# Altium PCB acqboard.PcbDoc (part 2 of 5)
Units mil, origin at the board's own origin, x right, y up, seen from the top; angles counter-clockwise.
Board outline 7000 x 5250 mil, 4 copper layers (Top Layer, Internal Plane 1, Internal Plane 2, Bottom Layer); 570 components, 356 nets, 1973 pads, 766 vias.
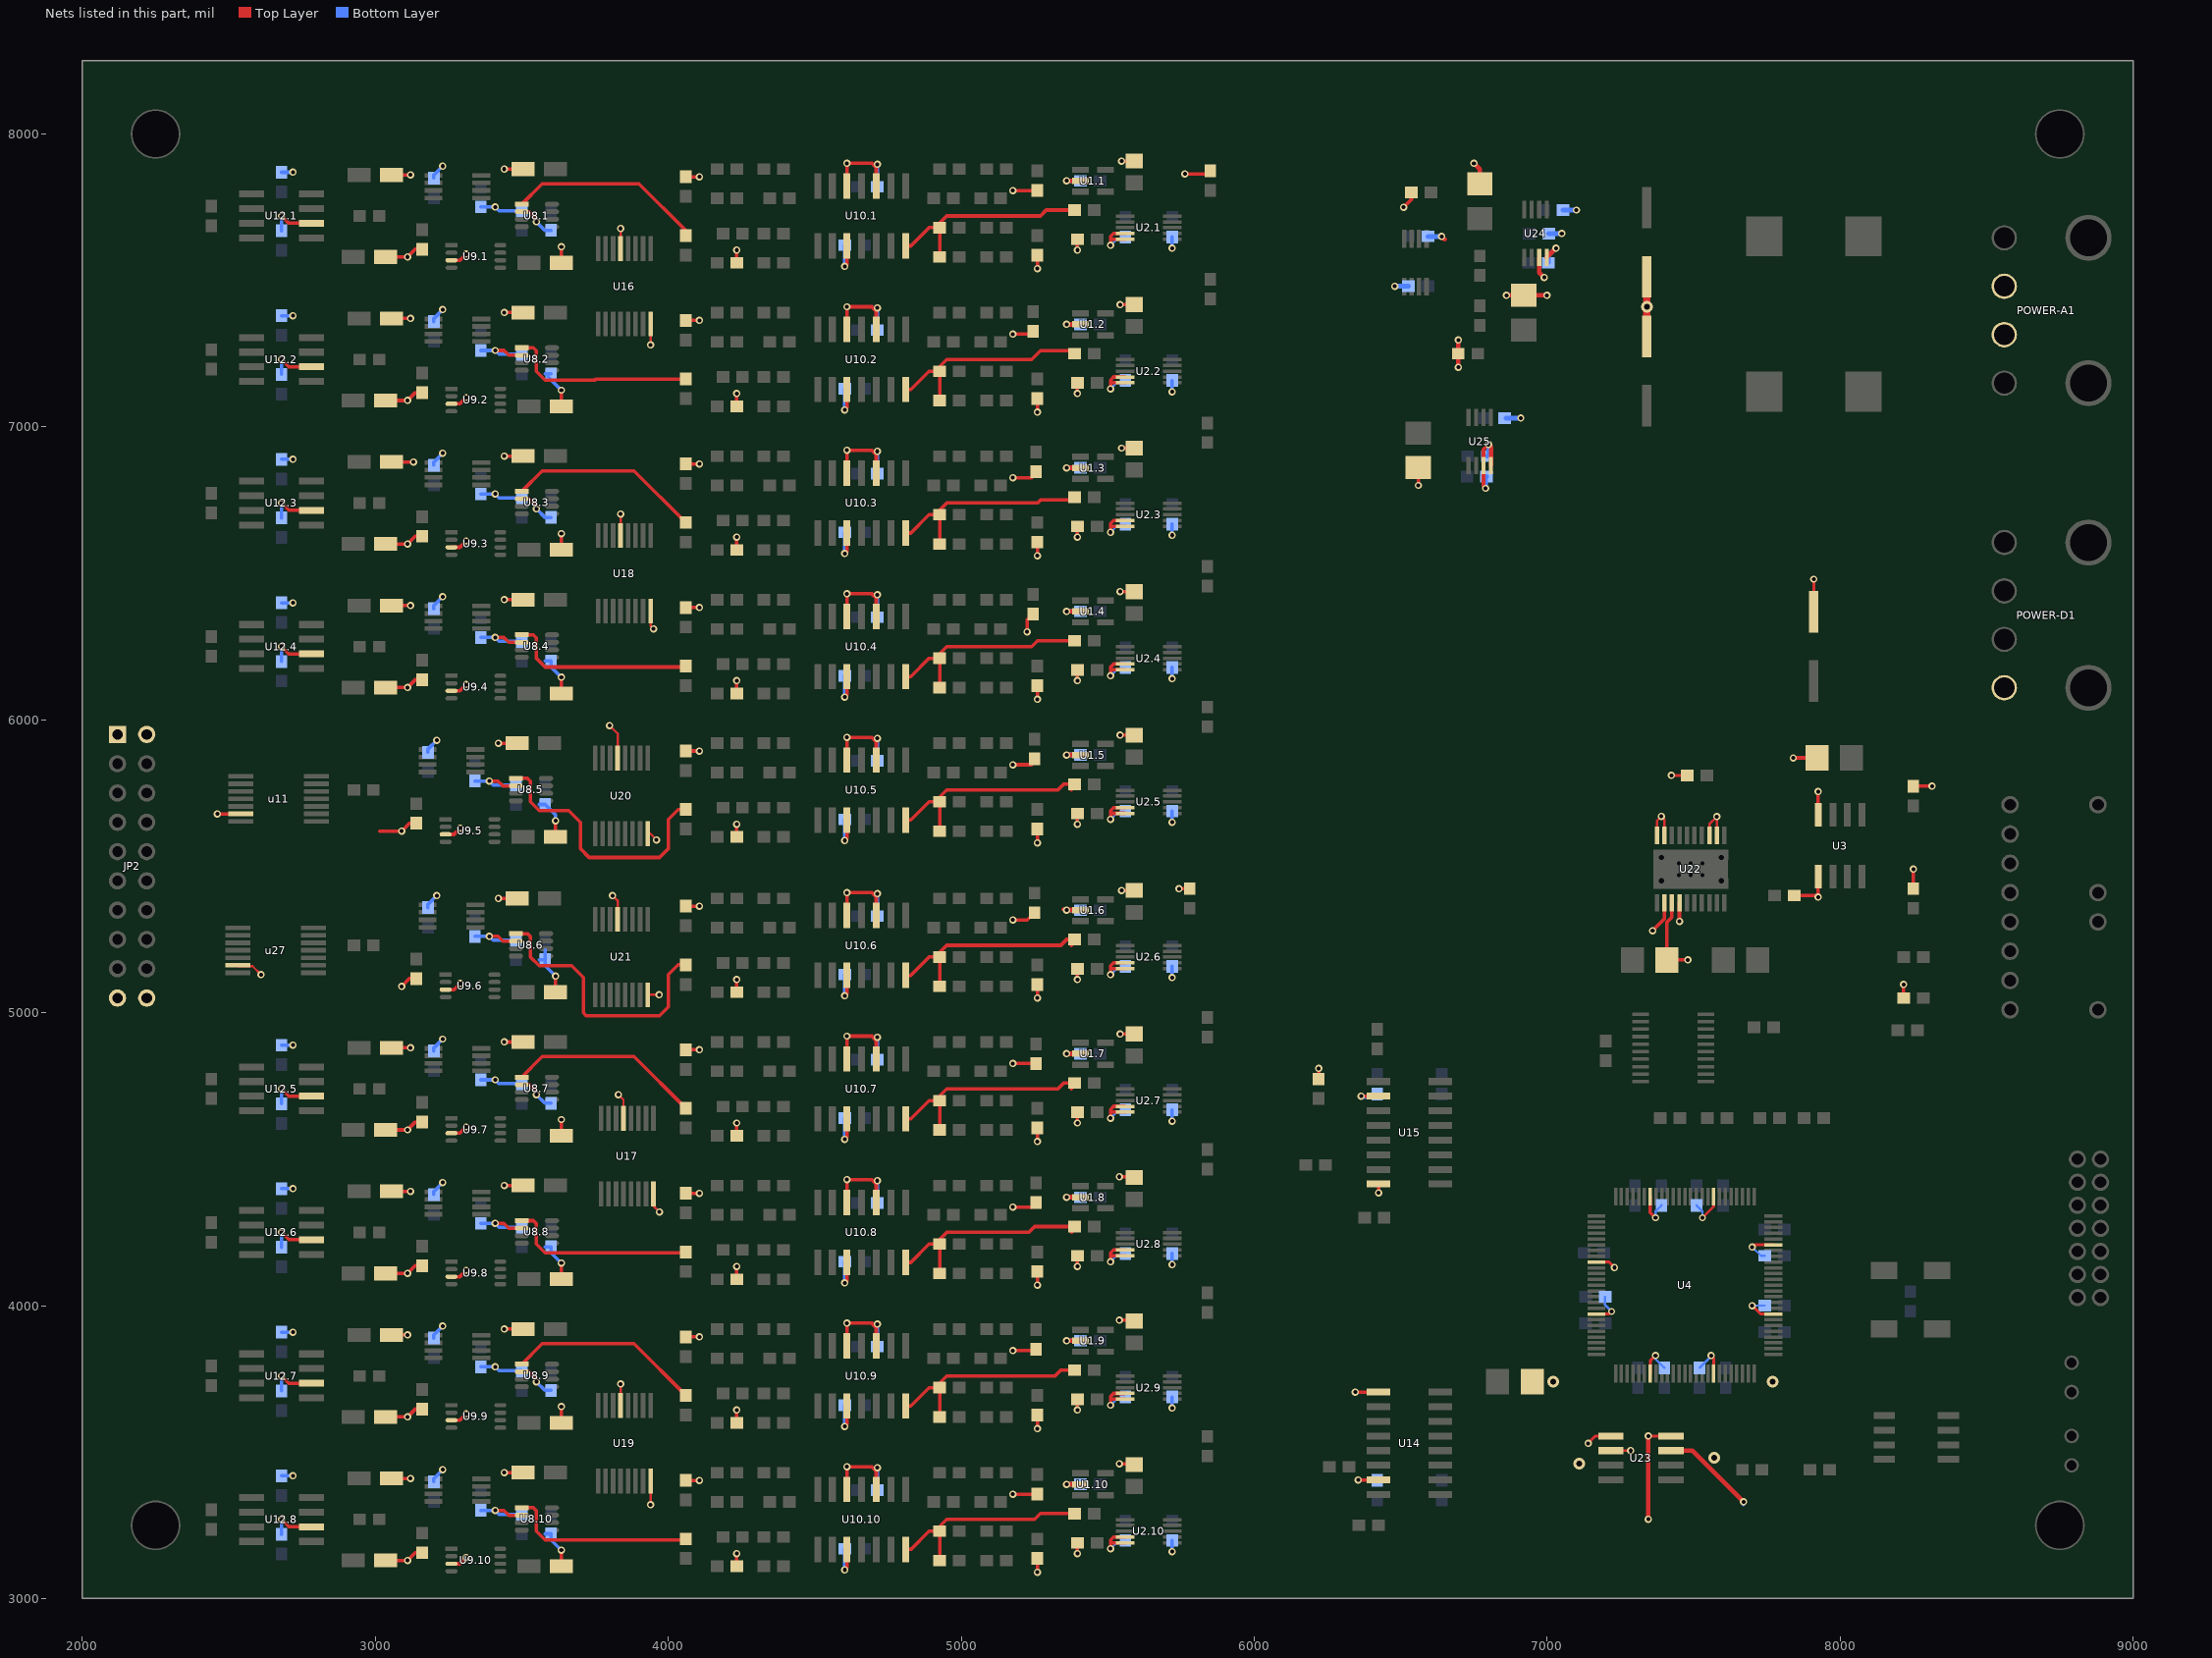
[diagram p4: the nets of this part, all layers, seen from the top]

## Components (designator, comment, footprint, x,y, rotation, side; value= is the part's Value field where it differs from the comment) (continued)
U8.2 "LTC6910-1" TSOT-23-8 3500,7270 r0 top (schematic designator U8)
U8.3 "LTC6910-1" TSOT-23-8 3500,6780 r0 top (schematic designator U8)
U8.4 "LTC6910-1" TSOT-23-8 3500,6290 r0 top (schematic designator U8)
U8.5 "LTC6910-1" TSOT-23-8 3480,5800 r0 top (schematic designator U8)
U8.6 "LTC6910-1" TSOT-23-8 3480,5270 r0 top (schematic designator U8)
U8.7 "LTC6910-1" TSOT-23-8 3500,4780 r0 top (schematic designator U8)
U8.8 "LTC6910-1" TSOT-23-8 3500,4290 r0 top (schematic designator U8)
U8.9 "LTC6910-1" TSOT-23-8 3500,3800 r0 top (schematic designator U8)
U8.10 "LTC6910-1" TSOT-23-8 3500,3310 r0 top (schematic designator U8)
U9.1 "ADG619BRM" MSOP8 3260,7620 r0 top (schematic designator U9)
U9.2 "ADG619BRM" MSOP8 3260,7130 r0 top (schematic designator U9)
U9.3 "ADG619BRM" MSOP8 3260,6640 r0 top (schematic designator U9)
U9.4 "ADG619BRM" MSOP8 3260,6150 r0 top (schematic designator U9)
U9.5 "ADG619BRM" MSOP8 3240,5660 r0 top (schematic designator U9)
U9.6 "ADG619BRM" MSOP8 3240,5130 r0 top (schematic designator U9)
U9.7 "ADG619BRM" MSOP8 3260,4640 r0 top (schematic designator U9)
U9.8 "ADG619BRM" MSOP8 3260,4150 r0 top (schematic designator U9)
U9.9 "ADG619BRM" MSOP8 3260,3660 r0 top (schematic designator U9)
U9.10 "ADG619BRM" MSOP8 3260,3170 r0 top (schematic designator U9)
U10.1 "AD8513 ARU" SO-G14 4660,7720 r0 top (schematic designator U10)
U10.2 "AD8513 ARU" SO-G14 4660,7230 r0 top (schematic designator U10)
U10.3 "AD8513 ARU" SO-G14 4660,6740 r0 top (schematic designator U10)
U10.4 "AD8513 ARU" SO-G14 4660,6250 r0 top (schematic designator U10)
U10.5 "AD8513 ARU" SO-G14 4660,5760 r0 top (schematic designator U10)
U10.6 "AD8513 ARU" SO-G14 4660,5230 r0 top (schematic designator U10)
U10.7 "AD8513 ARU" SO-G14 4660,4740 r0 top (schematic designator U10)
U10.8 "AD8513 ARU" SO-G14 4660,4250 r0 top (schematic designator U10)
U10.9 "AD8513 ARU" SO-G14 4660,3760 r0 top (schematic designator U10)
U10.10 "AD8513 ARU" SO-G14 4660,3270 r0 top (schematic designator U10)
u11 "ADG604YRU" SSO-G14/X.4 2670,5730 r90 top
U12.1 "AD8221AR" SO-G8 2680,7720 r270 top (schematic designator U12)
U12.2 "AD8221AR" SO-G8 2680,7230 r270 top (schematic designator U12)
U12.3 "AD8221AR" SO-G8 2680,6740 r270 top (schematic designator U12)
U12.4 "AD8221AR" SO-G8 2680,6250 r270 top (schematic designator U12)
U12.5 "AD8221AR" SO-G8 2680,4740 r270 top (schematic designator U12)
U12.6 "AD8221AR" SO-G8 2680,4250 r270 top (schematic designator U12)
U12.7 "AD8221AR" SO-G8 2680,3760 r270 top (schematic designator U12)
U12.8 "AD8221AR" SO-G8 2680,3270 r270 top (schematic designator U12)
U14 "IL715-3" SO-G16/D10 6530,3530 r90 top
U15 "IL716-3" SO-G16/D10 6530,4590 r270 top
U16 "SN74LV595APWR" SSO-G16/X.4 3850,7480 r0 top
U17 "SN74LV595APWR" SSO-G16/X.4 3860,4510 r0 top
U18 "SN74LV595APWR" SSO-G16/X.4 3850,6500 r0 top
U19 "SN74LV595APWR" SSO-G16/X.4 3850,3530 r0 top
U20 "SN74LV595APWR" SSO-G16/X.4 3840,5740 r0 top
U21 "SN74LV595APWR" SSO-G16/X.4 3840,5190 r0 top
U22 "TPS70245PWP" "PWP PowerPad -20" 7490,5490 r270 top
U23 "TPS77525D" SO-G8 7320,3480 r90 top
U24 "MAX6126A21 2.048V" TSSO3x5-G8/X.35 6960,7660 r0 top
U25 "MAX6126A21 2.048V" TSSO3x5-G8/X.35 6770,6950 r0 top
U26 "OP1177AR" TSSO3X5-G8/X.4 6550,7560 r0 top
u27 "ADG604YRU" SSO-G14/X.4 2660,5213 r90 top

## Footprints (in the part's own frame and the unit in brackets; to place one, negate y for a bottom-side part, rotate by r counter-clockwise, add the part's x,y. Pads: shape width x height; smd on the part's side, far side on the other; paste and mask are expansions set on the pad)
0603 [mm] "Chip Capacitor; Body 1.6 x 0.8 mm (LxW typ)"
  rect 1.1x1 smd: 1(-0.85,0) 2(0.85,0)
  silkscreen extent -1.7,-0.4 -1.7,0.4
0805 [mm] "Chip Capacitor; Body 2.0 x 1.2 mm (LxW typ)"
  rect 1.3x1.5 smd: 1(-0.95,0) 2(0.95,0)
  silkscreen extent -1.9,-0.65 -1.9,0.65
"AD RM-10" [mm] "Shrink Small Outline; 10 Leads; Body Width 3 mm; Pitch 0.5 mm"
  rect 0.3x1.6 smd: 1(-1,-2.05) 2(-0.5,-2.05) 3(0,-2.05) 4(0.5,-2.05) 5(1,-2.05) 6(1,2.05) 7(0.5,2.05) 8(0,2.05) 9(-0.5,2.05) 10(-1,2.05)
  silkscreen extent -1.82,-2.17 1.58,0.85
CC1608-0603 [mm] "Chip Capacitor; Body 1.6 x 0.8 mm (LxW typ)"
  rect 1.1x1 smd: 1(-0.85,0) 2(0.85,0)
  silkscreen extent -1.7,-0.4 -1.7,0.4
F-QFP14X14-G100/N [mm]
  rect 1.55x0.3 smd: 1(-7.675,6) 2(-7.675,5.5) 3(-7.675,5) 4(-7.675,4.5) 5(-7.675,4) 6(-7.675,3.5) 7(-7.675,3) 8(-7.675,2.5) 9(-7.675,2) 10(-7.675,1.5) 11(-7.675,1) 12(-7.675,0.5) 13(-7.675,0) 14(-7.675,-0.5) 15(-7.675,-1) 16(-7.675,-1.5) 17(-7.675,-2) 18(-7.675,-2.5) 19(-7.675,-3) 20(-7.675,-3.5) 21(-7.675,-4) 22(-7.675,-4.5) 23(-7.675,-5) 24(-7.675,-5.5) 25(-7.675,-6) 51(7.675,-6) 52(7.675,-5.5) 53(7.675,-5) 54(7.675,-4.5) 55(7.675,-4) 56(7.675,-3.5) 57(7.675,-3) 58(7.675,-2.5) 59(7.675,-2) 60(7.675,-1.5) 61(7.675,-1) 62(7.675,-0.5) 63(7.675,0) 64(7.675,0.5) 65(7.675,1) 66(7.675,1.5) 67(7.675,2) 68(7.675,2.5) 69(7.675,3) 70(7.675,3.5) 71(7.675,4) 72(7.675,4.5) 73(7.675,5) 74(7.675,5.5) 75(7.675,6)
  rect 0.3x1.55 smd: 26(-6,-7.675) 27(-5.5,-7.675) 28(-5,-7.675) 29(-4.5,-7.675) 30(-4,-7.675) 31(-3.5,-7.675) 32(-3,-7.675) 33(-2.5,-7.675) 34(-2,-7.675) 35(-1.5,-7.675) 36(-1,-7.675) 37(-0.5,-7.675) 38(0,-7.675) 39(0.5,-7.675) 40(1,-7.675) 41(1.5,-7.675) 42(2,-7.675) 43(2.5,-7.675) 44(3,-7.675) 45(3.5,-7.675) 46(4,-7.675) 47(4.5,-7.675) 48(5,-7.675) 49(5.5,-7.675) 50(6,-7.675) 76(6,7.675) 77(5.5,7.675) 78(5,7.675) 79(4.5,7.675) 80(4,7.675) 81(3.5,7.675) 82(3,7.675) 83(2.5,7.675) 84(2,7.675) 85(1.5,7.675) 86(1,7.675) 87(0.5,7.675) 88(0,7.675) 89(-0.5,7.675) 90(-1,7.675) 91(-1.5,7.675) 92(-2,7.675) 93(-2.5,7.675) 94(-3,7.675) 95(-3.5,7.675) 96(-4,7.675) 97(-4.5,7.675) 98(-5,7.675) 99(-5.5,7.675) 100(-6,7.675)
  silkscreen extent -7.8,-6.5 6.5,6.82
HDR2x7-2mm [mm]
  round 1.5 hole 1: 1(0,0) 2(-2,0) 3(0,2) 4(-2,2) 5(0,4) 6(-2,4) 7(0,6) 8(-2,6) 9(0,8) 10(-2,8) 11(0,10) 12(-2,10) 13(0,12) 14(-2,12)
  silkscreen extent -3.5,-1.5 1.5,13.5
HDR2X10 [mm]
  rect 1.5x1.5 hole 0.9: 1(0,0)
  round 1.5 hole 0.9: 2(0,2.54) 3(2.54,0) 4(2.54,2.54) 5(5.08,0) 6(5.08,2.54) 7(7.62,0) 8(7.62,2.54) 9(10.16,0) 10(10.16,2.54) 11(12.7,0) 12(12.7,2.54) 13(15.24,0) 14(15.24,2.54) 15(17.78,0) 16(17.78,2.54) 17(20.32,0) 18(20.32,2.54) 19(22.86,0) 20(22.86,2.54)
  silkscreen extent -1.27,-1.27 24.13,3.81
HPVL [mil]
  round 60 hole 40: 1(150,0) 2(50,0) 3(-50,0) 4(-150,0) 5(-150,-300) 8(150,-300)
  silkscreen extent -200,-370 200,100
"LUMEX DUAL RT-ANG LED" [mil] "Lumex Dual Right-angle LED holder for part SSF-LXH2100XX"
  round 50 hole 35: 1(-175.2,0) 2(-75,0) 3(75,0) 4(175.2,0)
  silkscreen extent -246,-217 246,150
MJ4RTHR [mm]
  round 4 hole 3.2: 0(-8.4,-7.3) 0(4.2,-7.3)
  round 2.2 hole 1.8: 1(4.2,0) 2(0,0) 3(-4.2,0) 4(-8.4,0)
  silkscreen extent -11.1,-14.2 6.9,-1.9
MSOP8 [mm]
  rect 1.04x0.38 smd: 1(0,0)
  oval 1.04x0.38 smd: 2(0,-0.65) 3(0,-1.3) 4(0,-1.95) 5(4.24,-1.95) 6(4.24,-1.3) 7(4.24,-0.65) 8(4.24,0)
  silkscreen extent 1.25,-2.28 2.99,0.33
PanasonicE [mm]
  rect 3.6x0.8 smd: 1(3,0) 2(-3,0)
  silkscreen extent -4.6,-4.1 4.6,4.2
"PWP PowerPad -20" [mil]
  rect 60x15 smd: 1(-115,115) 2(-115,89.4) 3(-115,63.8) 4(-115,38.2) 5(-115,12.6) 6(-115,-13) 7(-115,-38.6) 8(-115,-64.2) 9(-115,-89.8) 10(-115,-115.4) 11(115,-115.4) 12(115,-89.8) 13(115,-64.2) 14(115,-38.6) 15(115,-13) 16(115,12.6) 17(115,38.2) 18(115,63.8) 19(115,89.4) 20(115,115)
  rect 62x101 smd paste+0 mask+0: P0(0,0)
  round 20 hole 18 mask-20: P1(40,105) P2(-40,105) P3(40,-100) P4(-40,-100)
  round 20 hole 13.5 mask-20: P5(-20,40) P6(-20,0) P7(-20,-40) P8(20,40) P9(20,0) P10(20,-40)
  rect 36x256 smd mask+0: P11(49,0) p12(-49,0)
  rect 62x77.5 smd mask+0: p16(0,-89) p17(0,89)
  silkscreen extent -75,-140 75,140
SG636PCE [mm]
  rect 2.3x1.5 smd: 1(0,0) 4(0,-5.08) 5(4.6,-5.08) 8(4.6,0)
  silkscreen extent 0,-8.64 4.57,3.05
SO-G5/P.95 [mm] "SOT-23/SC-74A; 5 Leads; Body 3.1 x 3 mm, inc. leads (LxW max)"
  rect 0.55x1.45 smd: 1(-0.95,-1.075) 2(0,-1.075) 3(0.95,-1.075) 4(0.95,1.075) 5(-0.95,1.075)
  silkscreen extent -1.67,-2.22 1.55,0.9
SO-G8 [mm]
  rect 0.6x2.2 smd: 1(-1.905,-2.6) 2(-0.635,-2.6) 3(0.635,-2.6) 4(1.905,-2.6) 5(1.905,2.6) 6(0.635,2.6) 7(-0.635,2.6) 8(-1.905,2.6)
  silkscreen extent -2.88,-2.72 2.5,1.1
SO-G8/E2.5 [mm]
  rect 0.6x2.05 smd: 1(-1.905,-2.675) 2(-0.635,-2.675) 3(0.635,-2.675) 4(1.905,-2.675) 5(1.905,2.675) 6(0.635,2.675) 7(-0.635,2.675) 8(-1.905,2.675)
  silkscreen extent -2.88,-2.8 2.5,1.25
SO-G8/E2.9 [mm]
  rect 0.6x1.85 smd: 1(-1.905,-2.775) 2(-0.635,-2.775) 3(0.635,-2.775) 4(1.905,-2.775) 5(1.905,2.775) 6(0.635,2.775) 7(-0.635,2.775) 8(-1.905,2.775)
  silkscreen extent -2.88,-2.9 2.5,1.45
SO-G14 [mm]
  rect 0.6x2.2 smd: 1(-3.81,-2.6) 2(-2.54,-2.6) 3(-1.27,-2.6) 4(0,-2.6) 5(1.27,-2.6) 6(2.54,-2.6) 7(3.81,-2.6) 8(3.81,2.6) 9(2.54,2.6) 10(1.27,2.6) 11(0,2.6) 12(-1.27,2.6) 13(-2.54,2.6) 14(-3.81,2.6)
  silkscreen extent -4.78,-2.72 4.38,1.1
SO-G16/D10 [mm]
  rect 0.6x2.05 smd: 1(-4.445,-2.675) 2(-3.175,-2.675) 3(-1.905,-2.675) 4(-0.635,-2.675) 5(0.635,-2.675) 6(1.905,-2.675) 7(3.175,-2.675) 8(4.445,-2.675) 9(4.445,2.675) 10(3.175,2.675) 11(1.905,2.675) 12(0.635,2.675) 13(-0.635,2.675) 14(-1.905,2.675) 15(-3.175,2.675) 16(-4.445,2.675)
  silkscreen extent -5.42,-2.8 5,1.25
SSO-G14/X.4 [mm]
  rect 0.4x2.15 smd: 1(-1.95,-3.275) 2(-1.3,-3.275) 3(-0.65,-3.275) 4(0,-3.275) 5(0.65,-3.275) 6(1.3,-3.275) 7(1.95,-3.275) 8(1.95,3.275) 9(1.3,3.275) 10(0.65,3.275) 11(0,3.275) 12(-0.65,3.275) 13(-1.3,3.275) 14(-1.95,3.275)
  silkscreen extent -3.25,-3.4 3.25,1.8
SSO-G16/X.4 [mm]
  rect 0.4x2.15 smd: 1(-2.275,-3.275) 2(-1.625,-3.275) 3(-0.975,-3.275) 4(-0.325,-3.275) 5(0.325,-3.275) 6(0.975,-3.275) 7(1.625,-3.275) 8(2.275,-3.275) 9(2.275,3.275) 10(1.625,3.275) 11(0.975,3.275) 12(0.325,3.275) 13(-0.325,3.275) 14(-0.975,3.275) 15(-1.625,3.275) 16(-2.275,3.275)
  silkscreen extent -3.25,-3.4 3.25,1.8
STEWARD_1SR [mil]
  rect 124x136 smd: 1(-169,0) 2(169,0)
  silkscreen extent -263,-100 263,100
TC3216-1206 [mm]
  rect 2x1.2 smd: 1(-1.4,0) 2(1.4,0)
  silkscreen extent -2.8,-1 2.3,1
TC3528-1411 [mm]
  rect 2x2.2 smd: 1(-1.5,0) 2(1.5,0)
  silkscreen extent -2.9,-1.5 2.4,1.5
TSOT-23-8 [mm]
  rect 1.22x0.43 smd: 1(0,0)
  oval 1.22x0.43 smd: 2(0,-0.65) 3(0,-1.3) 4(0,-1.95) 5(2.62,-1.95) 6(2.62,-1.3) 7(2.62,-0.65) 8(2.62,0)
  silkscreen extent 0.9,-2.35 1.75,0.25
TSSO3X5-G8/X.4 [mm]
  rect 0.4x1.55 smd: 1(-0.975,-2.075) 2(-0.325,-2.075) 3(0.325,-2.075) 4(0.975,-2.075) 5(0.975,2.075) 6(0.325,2.075) 7(-0.325,2.075) 8(-0.975,2.075)
  silkscreen extent -1.85,-2.2 1.55,0.9
TSSO3x5-G8/X.35 [mm] "Shrink Small Outline; 8 Leads; Body Width 3 mm; Pitch 0.65 mm"
  rect 0.35x1.5 smd: 1(-0.975,-2.075) 2(-0.325,-2.075) 3(0.325,-2.075) 4(0.975,-2.075) 5(0.975,2.075) 6(0.325,2.075) 7(-0.325,2.075) 8(-0.975,2.075)
  silkscreen extent -1.82,-2.2 1.52,0.92
TSSO6x6-G20/X.3 [mm]
  rect 0.3x1.45 smd: 1(-2.925,-2.825) 2(-2.275,-2.825) 3(-1.625,-2.825) 4(-0.975,-2.825) 5(-0.325,-2.825) 6(0.325,-2.825) 7(0.975,-2.825) 8(1.625,-2.825) 9(2.275,-2.825) 10(2.925,-2.825) 11(2.925,2.825) 12(2.275,2.825) 13(1.625,2.825) 14(0.975,2.825) 15(0.325,2.825) 16(-0.325,2.825) 17(-0.975,2.825) 18(-1.625,2.825) 19(-2.275,2.825) 20(-2.925,2.825)
  silkscreen extent -3.75,-2.95 3.3,1.7

## Part data
C1.1 C1.2 C1.3 C1.4 C1.5 C1.6 C1.7 C1.8 C1.9 C1.10 C3.1 C3.2 C3.3 C3.4 C3.5 C3.6 C3.7 C3.8 C3.9 C3.10 C4.1 C4.2 C4.3 C4.4 C4.5 C4.6 C4.7 C4.8 C4.9 C4.10 C5.1 C5.2 C5.3 C5.4 C5.5 C5.6 C5.7 C5.8 C5.9 C5.10 C8 C9 C10 C12 C13 C14 C15 C16 C17 C18 C19 C20 C21 C22 C23 C24 C25 C26 C28.1 C28.2 C28.3 C28.4 C28.5 C28.6 C28.7 C28.8 C28.9 C28.10 C29.1 C29.2 C29.3 C29.4 C29.5 C29.6 C29.7 C29.8 C29.9 C29.10 C30.1 C30.2 C30.3 C30.4 C30.5 C30.6 C30.7 C30.8 C30.9 C30.10 C31.1 C31.2 C31.3 C31.4 C31.5 C31.6 C31.7 C31.8 C31.9 C31.10 C32.1 C32.2 C32.3 C32.4 C32.5 C32.6 C32.7 C32.8 C32.9 C32.10 C35.1 C35.2 C35.3 C35.4 C35.5 C35.6 C35.7 C35.8 C35.9 C35.10 C36.1 C36.2 C36.3 C36.4 C36.5 C36.6 C36.7 C36.8 C36.9 C36.10 C37.1 C37.2 C37.3 C37.4 C37.5 C37.6 C37.7 C37.8 C37.9 C37.10 C38.1 C38.2 C38.3 C38.4 C38.5 C38.6 C38.7 C38.8 C38.9 C38.10 C39.1 C39.2 C39.3 C39.4 C39.5 C39.6 C39.7 C39.8 C39.9 C39.10 C40.1 C40.2 C40.3 C40.4 C40.5 C40.6 C40.7 C40.8 C40.9 C40.10 C41.1 C41.2 C41.3 C41.4 C41.5 C41.6 C41.7 C41.8 C41.9 C41.10 C42.1 C42.2 C42.3 C42.4 C42.5 C42.6 C42.7 C42.8 C42.9 C42.10 C43.1 C43.2 C43.3 C43.4 C43.5 C43.6 C43.7 C43.8 C44.1 C44.2 C44.3 C44.4 C44.5 C44.6 C44.7 C44.8 C49 C50 C51 C52 C53 C55 C56 C57 C58 C59 C60 C65 C66 C71.1 C71.2 C71.3 C71.4 C71.5 C71.6 C71.7 C71.8 C71.9 C71.10 C72.1 C72.2 C72.3 C72.4 C72.5 C72.6 C72.7 C72.8 C72.9 C72.10 C76: "Capacitor"
C2.1 C2.2 C2.3 C2.4 C2.5 C2.6 C2.7 C2.8 C2.9 C2.10 C54: library part Cap, "Capacitor"
C11 C33.1 C33.2 C33.3 C33.4 C33.5 C33.6 C33.7 C33.8 C33.9 C33.10 C34.1 C34.2 C34.3 C34.4 C34.5 C34.6 C34.7 C34.8 C34.9 C34.10 C61 C62: library part Cap2, "Capacitor"
C45.1 C45.2 C45.3 C45.4 C45.5 C45.6 C45.7 C45.8 C46.1 C46.2 C46.3 C46.4 C46.5 C46.6 C46.7 C46.8: "Polarized Capacitor (Surface Mount)"
C63 C64: "Polarized Capacitor (Radial)"
C67 C68: library part "Cap Pol1", "Polarized Capacitor (Radial)"
C69 C70: library part "Cap Pol3", "Polarized Capacitor (Surface Mount)"
JP1: "Header, 7-Pin, Dual row"
JP2: "Header, 10-Pin, Dual row, Right Angle"
L1: library part "DUAL LED", "DUAL LED"
L2 L3: library part Inductor, "Inductor"
O1: library part HFBR-1528, "Low-cost fiber transmitter"
O2: library part OSC, "Epson CMOS/TTL Oscillator"
O3: library part HFBR-2528, "Low-cost fiber receiver"
POWER-A1 POWER-D1: library part "Header 4", "Header, 4-Pin"
R1 R2 R3 R4 R5 R6 R7 R8 R13.1 R13.2 R13.3 R13.4 R13.5 R13.6 R13.7 R13.8 R13.9 R13.10 R14.1 R14.2 R14.3 R14.4 R14.5 R14.6 R14.7 R14.8 R14.9 R14.10 R15.1 R15.2 R15.3 R15.4 R15.5 R15.6 R15.7 R15.8 R15.9 R15.10 R16.1 R16.2 R16.3 R16.4 R16.5 R16.6 R16.7 R16.8 R16.9 R16.10 R17.1 R17.2 R17.3 R17.4 R17.5 R17.6 R17.7 R17.8 R17.9 R17.10 R18.1 R18.2 R18.3 R18.4 R18.5 R18.6 R18.7 R18.8 R18.9 R18.10 R19.1 R19.2 R19.3 R19.4 R19.5 R19.6 R19.7 R19.8 R19.9 R19.10 R20.1 R20.2 R20.3 R20.4 R20.5 R20.6 R20.7 R20.8 R20.9 R20.10 R21.1 R21.2 R21.3 R21.4 R21.5 R21.6 R21.7 R21.8 R21.9 R21.10 R22.1 R22.2 R22.3 R22.4 R22.5 R22.6 R22.7 R22.8 R22.9 R22.10 R23.1 R23.2 R23.3 R23.4 R23.5 R23.6 R23.7 R23.8 R23.9 R23.10 R24.1 R24.2 R24.3 R24.4 R24.5 R24.6 R24.7 R24.8 R24.9 R24.10 R25.1 R25.2 R25.3 R25.4 R25.5 R25.6 R25.7 R25.8 R25.9 R25.10 R30.1 R30.2 R30.3 R30.4 R30.5 R30.6 R30.7 R30.8 R30.9 R30.10 R31 R32 R33 R34 R35 R36 R37 R38 R39 R40 R41 R42 R43 R44 R45 R46: "Resistor"
R9 R10 R11 R12 R27 R28 R29: library part Res1, "Resistor"
R26.1 R26.2 R26.3 R26.4 R26.5 R26.6 R26.7 R26.8: library part Res1, "RR1220P-4990-D-M"
U1.1 U1.2 U1.3 U1.4 U1.5 U1.6 U1.7 U1.8 U1.9 U1.10: "Analog Devices Precision Low Noise CMOS Rail-to-Rail Input/Output Operational Amplifier"
U2.1 U2.2 U2.3 U2.4 U2.5 U2.6 U2.7 U2.8 U2.9 U2.10: library part AD7685, "AD 16-bit 250 kSPS ADC"
U3: "Dual Peripheral Driver"
U4: library part XC3S50-VQ100, "Xilinx Spartan-3 VQ100"
U5: library part 25LC320-SOIC, "32k SPI Bus Serial EEPROM"
U6: "Xilinx Platform Flash"
U7.1 U7.2 U7.3 U7.4 U7.5 U7.6 U7.7 U7.8 U7.9 U7.10: library part OP1177, "AD Precision Low Noise, Low Input Bias Current Operational Amplifier"
U8.1 U8.2 U8.3 U8.4 U8.5 U8.6 U8.7 U8.8 U8.9 U8.10: library part LTC6910-2, "LTI Digitally Controlled Programmabe Gain Amp"
U9.1 U9.2 U9.3 U9.4 U9.5 U9.6 U9.7 U9.8 U9.9 U9.10: library part ADG619, "Low RON SPDT Switch"
U10.1 U10.2 U10.3 U10.4 U10.5 U10.6 U10.7 U10.8 U10.9 U10.10: library part AD8513ARU, "low-noise JFET quad OA"
u11 u27: library part ADG604, "1 pC Charge Injection 100pA leakage CMOS 4-channel mux"
U12.1 U12.2 U12.3 U12.4 U12.5 U12.6 U12.7 U12.8: library part AD8221, "AD8221 Precision Instrumentation Amplifier"
U14 U15: "High speed digital coupler"
U16 U17 U18 U19 U20 U21: "8-bit shift register with 3-state output"
U22: library part TPS702XX, "TI dual-output low dropout voltage regulators"
U23: library part TPS775XX, "Fast-transient-response 500 mA low-dropout voltage regulator"
U24 U25: library part LT1790
U26: library part OPA227UA, "OPA227UA"

## Free pads (board coordinates)
  round 170 hole 157 unplated: 1(2250,3250) 1(2250,8000) 1(8750,3250) 1(8750,8000)

## Via types
v1: diameter 25, hole 13.5, Top Layer to Bottom Layer, 753 vias
v2: diameter 40, hole 20, Top Layer to Bottom Layer, 13 vias

## Nets (pads, with @x,y where several pads share a name; then routed paths per layer and width w, separated by ;. In a path a pad name is that pad's centre, name@x,y a point inside that pad or via, vN(x,y) a via of type N, cw(c..) or ccw(c..) an arc to the next point about the centre after c; other vN are vias at no path point)
+1.2VCC: C20.1 C21.1 C22.1 C23.1 C68.1 U4.18 U4.45 U4.69 U4.93 U22.12 U22.13 U22.14 | length 947.6
  Top Layer w10: U4.93@7167.83,3971.57 7211.57,3971.57 v1(7220,3980) ; v1(7560,3830) 7568.43,3821.57 U4.18@7568.43,3767.83 ; v1(7700,4200) 7707.8,4207.8 U4.45@7772.17,4207.8
  Top Layer w12: U4.69@7351.89,4372.17 7351.89,4318.11 v1(7370,4300) ; v1(7360,5280) 7400.2,5320.2 U22.12@7400.2,5375 ; U22.13@7425.8,5375 7425.8,5325.8 7409.06,5309.06 C68.1@7409.06,5180 v1(7480,5180) ; v1(7451.4,5311.4) U22.14@7451.4,5375
  Bottom Layer w8: C22.1@7197.78,4030 7197.78,4002.22 v1(7220,3980) ; v1(7370,4300) 7370,4322.22 C23.1@7390,4342.22 ; C21.1@7520,3787.78 7560,3827.78 v1(7560,3830) ; v1(7700,4200) 7730,4170 C20.1@7742.22,4170
+2.5VCC: C24.1 C25.1 C26.1 C62.1 U4.7 U4.33 U4.58 U4.84 U23.5 U23.6 | length 621.4
  Top Layer w10: v1(7140,3530) 7165,3555 U23.5@7217.64,3555 ; U4.84@7167.83,4148.74 7211.26,4148.74 v1(7230,4130) ; U23.6@7217.64,3505 v1(7285,3505) ; U4.7@7351.89,3767.83 7351.89,3811.89 v1(7370,3830) ; v1(7530,4300) 7568.43,4338.43 U4.58@7568.43,4372.17 ; v1(7700,4000) 7728.43,3971.57 U4.33@7772.17,3971.57
  Bottom Layer w8: v1(7285,3505) v1@7290,3510 ; v1(7370,3830) 7370,3817.78 C26.1@7400,3787.78 ; C24.1@7510,4342.22 7530,4322.22 v1(7530,4300) ; v1(7700,4000) C25.1@7742.22,4000
  other v2: 7110,3460 7570,3480 7020,3740 7770,3740
+5VCC: C8.1 C11.1 C53.1 C61.1 POWER-D1.4 R1.2 R2.2 R4.1 U3.1 U3.8 U22.2 U22.3 U22.9 U22.10 U23.3 U23.4 | length 1651.6
  Top Layer w8: U22.10@7374.6,5605 7374.6,5654.6 v1(7390,5670) 7400.2,5659.8 U22.9@7400.2,5605 ; U22.3@7553.8,5605 7553.8,5643.8 v1(7579.4,5669.4) U22.2@7579.4,5605
  Top Layer w10: v1(7345,3555) U23.4@7422.36,3555 ; v1(7424,5810) C53.1@7478.54,5810 ; C61.1@7910,6368.11 v1(7910,6480)
  Top Layer w12: v1(7840,5870) C11.1@7930,5870 ; C8.1@7843.46,5400 v1@7920,5400 ; v1(7925,5395) U3.1@7925,5464.69 ; U3.8@7925,5675.31 v1(7925,5755) ; R4.1@8216.54,5050 v1(8216.54,5096.54) ; R2.2@8250,5423.46 v1(8250,5490) ; R1.2@8250,5773.46 v1(8313.46,5773.46)
  Top Layer w16: v1(7345,3271) v1(7345,3555) ; U23.3@7422.36,3505 7495,3505 v1(7670,3330)
  Bottom Layer w8: v1@7340,3560 v1(7345,3555) ; v1@7920,5390 v1(7925,5395) ; v1@7920,5760 v1(7925,5755)
  Bottom Layer w12: v1@7670,3320 v1(7670,3330)
AAIN1: R16.1.1 U8.1.1 | length 671.8
  Top Layer w12: U8.1.1@3500,7760 3570,7830 3900,7830 4060,7670 R16.1.1@4060,7653.46
AAIN2: R16.2.1 U8.2.1 | length 648
  Top Layer w12: U8.2.1@3500,7270 3540,7270 3550,7260 3550,7190 3580,7160 3750,7160 3753.46,7163.46 R16.2.1@4060,7163.46
AAIN3: R16.3.1 U8.3.1 | length 662.1
  Top Layer w12: U8.3.1@3500,6780 3570,6850 3883.46,6850 R16.3.1@4060,6673.46
AAIN4: R16.4.1 U8.4.1 | length 643.1
  Top Layer w12: U8.4.1@3500,6290 3540,6290 3550,6280 3550,6210 3580,6180 R16.4.1@4056.54,6180
AAIN5: R16.5.1 U8.5.1 | length 911.9
  Top Layer w12: U8.5.1@3480,5800 3520,5800 3530,5790 3530,5720 3560,5690 3660,5690 3700,5650 3700,5560 3730,5530 3970,5530 4000,5560 4000,5660 4033.46,5693.46 R16.5.1@4060,5693.46
AAIN6: R16.6.1 U8.6.1 | length 943.6
  Top Layer w12: U8.6.1@3480,5270 3520,5270 3530,5260 3530,5190 3560,5160 3670,5160 3710,5120 3710,5000 3720,4990 3970,4990 4000,5020 4000,5130 4033.46,5163.46 R16.6.1@4060,5163.46
AAIN7: R16.7.1 U8.7.1 | length 662.1
  Top Layer w12: U8.7.1@3500,4780 3570,4850 3883.46,4850 R16.7.1@4060,4673.46
AAIN8: R16.8.1 U8.8.1 | length 648
  Top Layer w12: U8.8.1@3500,4290 3540,4290 3550,4280 3550,4210 3580,4180 4056.54,4180 R16.8.1@4060,4183.46
AAIN9: R16.9.1 U8.9.1 | length 662.1
  Top Layer w12: U8.9.1@3500,3800 3570,3870 3883.46,3870 R16.9.1@4060,3693.46
AAIN10: R16.10.1 U8.10.1 | length 648
  Top Layer w12: U8.10.1@3500,3310 3540,3310 3550,3300 3550,3230 3580,3200 4056.54,3200 R16.10.1@4060,3203.46
AAOUT1: C40.1.1 R21.1.1 R30.1.1 U10.1.7 | length 736.9
  Top Layer w12: U10.1.7@4810,7617.64 4827.64,7617.64 4890,7680 R21.1.1@4926.54,7680 ; C40.1.1@4926.54,7580 4926.54,7696.54 4950,7720 5270,7720 5290,7740 R30.1.1@5386.54,7740
AAOUT2: C40.2.1 R21.2.1 R30.2.1 U10.2.7 | length 735.2
  Top Layer w12: U10.2.7@4820,7127.64 4827.64,7127.64 4890,7190 R21.2.1@4926.54,7190 ; C40.2.1@4926.54,7090 4926.54,7206.54 4950,7230 5240,7230 5270,7260 5376.54,7260 R30.2.1@5386.54,7250
AAOUT3: C40.3.1 R21.3.1 R30.3.1 U10.3.7 | length 736.9
  Top Layer w12: U10.3.7@4810,6637.64 4827.64,6637.64 4890,6700 R21.3.1@4926.54,6700 ; C40.3.1@4926.54,6600 4926.54,6716.54 4950,6740 5260,6740 5270,6750 5376.54,6750 R30.3.1@5386.54,6760
AAOUT4: C40.4.1 R21.4.1 R30.4.1 U10.4.7 | length 736.9
  Top Layer w12: U10.4.7@4810,6147.64 4827.64,6147.64 4890,6210 R21.4.1@4926.54,6210 ; C40.4.1@4926.54,6110 4926.54,6226.54 4950,6250 5240,6250 5260,6270 R30.4.1@5386.54,6270
AAOUT5: C40.5.1 R21.5.1 R30.5.1 U10.5.7 | length 765.2
  Top Layer w12: U10.5.7@4810,5657.64 4827.64,5657.64 4890,5720 R21.5.1@4926.54,5720 ; C40.5.1@4926.54,5620 4926.54,5736.54 4950,5760 5330,5760 5350,5780 R30.5.1@5386.54,5780 ; 5376.54,5760 R30.5.1@5396.54,5780
AAOUT6: C40.6.1 R21.6.1 R30.6.1 U10.6.7 | length 765.2
  Top Layer w12: U10.6.7@4810,5127.64 4827.64,5127.64 4890,5190 R21.6.1@4926.54,5190 ; C40.6.1@4926.54,5090 4926.54,5206.54 4950,5230 5340,5230 5360,5250 R30.6.1@5386.54,5250 ; 5376.54,5230 R30.6.1@5396.54,5250
AAOUT7: C40.7.1 R21.7.1 R30.7.1 U10.7.7 | length 765.2
  Top Layer w12: U10.7.7@4810,4637.64 4827.64,4637.64 4890,4700 R21.7.1@4926.54,4700 ; C40.7.1@4926.54,4600 4926.54,4716.54 4950,4740 5330,4740 5350,4760 R30.7.1@5386.54,4760 ; 5376.54,4740 R30.7.1@5396.54,4760
AAOUT8: C40.8.1 R21.8.1 R30.8.1 U10.8.7 | length 765.2
  Top Layer w12: U10.8.7@4810,4147.64 4827.64,4147.64 4890,4210 R21.8.1@4926.54,4210 ; C40.8.1@4926.54,4110 4926.54,4226.54 4950,4250 5230,4250 5250,4270 R30.8.1@5386.54,4270 ; 5376.54,4250 R30.8.1@5396.54,4270
AAOUT9: C40.9.1 R21.9.1 R30.9.1 U10.9.7 | length 736.9
  Top Layer w12: U10.9.7@4810,3657.64 4827.64,3657.64 4890,3720 R21.9.1@4926.54,3720 ; C40.9.1@4926.54,3620 4926.54,3736.54 4950,3760 5320,3760 5340,3780 R30.9.1@5386.54,3780
AAOUT10: C40.10.1 R21.10.1 R30.10.1 U10.10.7 | length 736.9
  Top Layer w12: U10.10.7@4810,3167.64 4827.64,3167.64 4890,3230 R21.10.1@4926.54,3230 ; C40.10.1@4926.54,3130 4926.54,3246.54 4950,3270 5250,3270 5270,3290 R30.10.1@5386.54,3290
AGND: C1.1.2 C1.2.2 C1.3.2 C1.4.2 C1.5.2 C1.6.2 C1.7.2 C1.8.2 C1.9.2 C1.10.2 C2.1.1 C2.2.1 C2.3.1 C2.4.1 C2.5.1 C2.6.1 C2.7.1 C2.8.1 C2.9.1 C2.10.1 C3.1.1 C3.2.1 C3.3.1 C3.4.1 C3.5.1 C3.6.1 C3.7.1 C3.8.1 C3.9.1 C3.10.1 C4.1.1 C4.2.1 C4.3.1 C4.4.1 C4.5.1 C4.6.1 C4.7.1 C4.8.1 C4.9.1 C4.10.1 C5.1.1 C5.2.1 C5.3.1 C5.4.1 C5.5.1 C5.6.1 C5.7.1 C5.8.1 C5.9.1 C5.10.1 C28.1.2 C28.2.2 C28.3.2 C28.4.2 C28.5.2 C28.6.2 C28.7.2 C28.8.2 C28.9.2 C28.10.2 C29.1.2 C29.2.2 C29.3.2 C29.4.2 C29.5.2 C29.6.2 C29.7.2 C29.8.2 C29.9.2 C29.10.2 C31.1.2 C31.2.2 C31.3.2 C31.4.2 C31.5.2 C31.6.2 C31.7.2 C31.8.2 C31.9.2 C31.10.2 C32.1.1 C32.2.1 C32.3.1 C32.4.1 C32.5.1 C32.6.1 C32.7.1 C32.8.1 C32.9.1 C32.10.1 C33.1.2 C33.2.2 C33.3.2 C33.4.2 C33.5.2 C33.6.2 C33.7.2 C33.8.2 C33.9.2 C33.10.2 C34.1.1 C34.2.1 C34.3.1 C34.4.1 C34.5.1 C34.6.1 C34.7.1 C34.8.1 C34.9.1 C34.10.1 C37.1.1 C37.2.1 C37.3.1 C37.4.1 C37.5.1 C37.6.1 C37.7.1 C37.8.1 C37.9.1 C37.10.1 C38.1.1 C38.2.1 C38.3.1 C38.4.1 C38.5.1 C38.6.1 C38.7.1 C38.8.1 C38.9.1 C38.10.1 C41.1.1 C41.2.1 C41.3.1 C41.4.1 C41.5.1 C41.6.1 C41.7.1 C41.8.1 C41.9.1 C41.10.1 C42.1.1 C42.2.1 C42.3.1 C42.4.1 C42.5.1 C42.6.1 C42.7.1 C42.8.1 C42.9.1 C42.10.1 C43.1.2 C43.2.2 C43.3.2 C43.4.2 C43.5.2 C43.6.2 C43.7.2 C43.8.2 C44.1.2 C44.2.2 C44.3.2 C44.4.2 C44.5.2 C44.6.2 C44.7.2 C44.8.2 C45.1.2 C45.2.2 C45.3.2 C45.4.2 C45.5.2 C45.6.2 C45.7.2 C45.8.2 C46.1.1 C46.2.1 C46.3.1 C46.4.1 C46.5.1 C46.6.1 C46.7.1 C46.8.1 C49.1 C51.1 C54.2 C55.2 C56.2 C57.2 C58.1 C59.1 C60.2 C63.2 C64.2 C65.2 C66.2 C69.2 C70.1 C71.1.1 C71.2.1 C71.3.1 C71.4.1 C71.5.1 C71.6.1 C71.7.1 C71.8.1 C71.9.1 C71.10.1 C72.1.2 C72.2.2 C72.3.2 C72.4.2 C72.5.2 C72.6.2 C72.7.2 C72.8.2 C72.9.2 C72.10.2 C76.2 JP2.1 JP2.2 JP2.19 JP2.20 POWER-A1.2 POWER-A1.3 R13.1.1 R13.2.1 R13.3.1 R13.4.1 R13.5.1 R13.6.1 R13.7.1 R13.8.1 R13.9.1 R13.10.1 R29.1 R38.1 R45.1 R46.1 U1.1.2 U1.2.2 U1.3.2 U1.4.2 U1.5.2 U1.6.2 U1.7.2 U1.8.2 U1.9.2 U1.10.2 U2.1.4 U2.1.5 U2.2.4 U2.2.5 U2.3.4 U2.3.5 U2.4.4 U2.4.5 U2.5.4 U2.5.5 U2.6.4 U2.6.5 U2.7.4 U2.7.5 U2.8.4 U2.8.5 U2.9.4 U2.9.5 U2.10.4 U2.10.5 U8.1.2 U8.2.2 U8.3.2 U8.4.2 U8.5.2 U8.6.2 U8.7.2 U8.8.2 U8.9.2 U8.10.2 U9.1.3 U9.2.3 U9.3.3 U9.4.3 U9.5.3 U9.6.3 U9.7.3 U9.8.3 U9.9.3 U9.10.3 U10.1.3 U10.1.10 U10.1.12 U10.2.3 U10.2.10 U10.2.12 U10.3.3 U10.3.10 U10.3.12 U10.4.3 U10.4.10 U10.4.12 U10.5.3 U10.5.10 U10.5.12 U10.6.3 U10.6.10 U10.6.12 U10.7.3 U10.7.10 U10.7.12 U10.8.3 U10.8.10 U10.8.12 U10.9.3 U10.9.10 U10.9.12 U10.10.3 U10.10.10 U10.10.12 u11.13 U12.1.6 U12.2.6 U12.3.6 U12.4.6 U12.5.6 U12.6.6 U12.7.6 U12.8.6 U14.9 U14.15 U15.2 U15.8 U16.8 U16.13 U17.8 U17.13 U18.8 U18.13 U19.8 U19.13 U20.8 U20.13 U21.8 U21.13 U24.3 U24.4 U25.3 U25.4 u27.13 | length 22944.5
  Top Layer w8: u27.13@2531.06,5158.82 2581.18,5158.82 v1(2610,5130) ; v1(3800,5980) 3827.2,5952.8 U20.13@3827.2,5868.94 ; v1(3810,5400) 3827.2,5382.8 U21.13@3827.2,5318.94 ; v1(3830,4720) 3847.2,4702.8 U17.13@3847.2,4638.94 ; U19.13@3837.2,3658.94 v1(3837.2,3732.8) ; U18.13@3837.2,6628.94 v1(3837.2,6702.8) ; U16.13@3837.2,7608.94 v1(3837.2,7677.2) ; U21.8@3929.57,5061.06 v1(3968.94,5061.06) ; U20.8@3929.57,5611.06 3938.94,5611.06 v1(3960,5590) ; v1(3939.57,3320.43) U19.8@3939.57,3401.06 ; U18.8@3939.57,6371.06 3939.57,6320.43 v1(3950,6310) ; U16.8@3939.57,7351.06 3939.57,7280.43 v1(3940,7280) ; U17.8@3949.57,4381.06 3949.57,4340.43 v1(3970,4320)
  Top Layer w12: v1(2461.18,5678.82) u11.13@2541.06,5678.82 ; v1(2680,3270) 2705,3245 U12.8.6@2782.36,3245 ; v1(2680,3760) 2705,3735 U12.7.6@2782.36,3735 ; v1(2680,4250) 2705,4225 U12.6.6@2782.36,4225 ; v1(2680,4740) 2705,4715 U12.5.6@2782.36,4715 ; v1(2680,6250) 2705,6225 U12.4.6@2782.36,6225 ; v1(2680,6740) 2705,6715 U12.3.6@2782.36,6715 ; v1(2680,7230) 2705,7205 U12.2.6@2782.36,7205 ; v1(2680,7720) 2705,7695 U12.1.6@2782.36,7695 ; 3015.12,5620 v1(3090,5620) 3116.54,5646.54 R13.5.1@3140,5646.54 ; C46.8.1@3035.12,3130 v1(3110,3130) 3136.54,3156.54 R13.10.1@3160,3156.54 ; C46.7.1@3035.12,3620 v1(3110,3620) 3136.54,3646.54 R13.9.1@3160,3646.54 ; C46.6.1@3035.12,4110 v1(3110,4110) 3136.54,4136.54 R13.8.1@3160,4136.54 ; C46.5.1@3035.12,4600 v1(3110,4600) 3136.54,4626.54 R13.7.1@3160,4626.54 ; C46.4.1@3035.12,6110 v1(3110,6110) 3136.54,6136.54 R13.4.1@3160,6136.54 ; C46.3.1@3035.12,6600 v1(3110,6600) 3136.54,6626.54 R13.3.1@3160,6626.54 ; C46.2.1@3035.12,7090 v1(3110,7090) 3136.54,7116.54 R13.2.1@3160,7116.54 ; C46.1.1@3035.12,7580 v1(3110,7580) 3136.54,7606.54 R13.1.1@3160,7606.54 ; C45.8.2@3055.12,3410 v1(3120,3410) ; C45.7.2@3055.12,3900 v1(3110,3900) ; C45.6.2@3055.12,4390 v1(3120,4390) ; C45.5.2@3055.12,4880 v1(3120,4880) ; C45.4.2@3055.12,6390 v1(3120,6390) ; C45.3.2@3055.12,6880 v1(3130,6880) ; C45.2.2@3055.12,7370 v1(3120,7370) ; C45.1.2@3055.12,7860 v1(3120,7860) ; v1(3090,5090) 3116.54,5116.54 R13.6.1@3140,5116.54 ; U9.6.3@3240,5078.82 3268.82,5078.82 v1(3290,5100) ; U9.5.3@3240,5608.82 3268.82,5608.82 v1(3290,5630) ; U9.10.3@3260,3118.82 3288.82,3118.82 v1(3310,3140) ; U9.9.3@3260,3608.82 3288.82,3608.82 v1(3310,3630) ; U9.8.3@3260,4098.82 3288.82,4098.82 v1(3310,4120) ; U9.7.3@3260,4588.82 3288.82,4588.82 v1(3310,4610) ; U9.4.3@3260,6098.82 3288.82,6098.82 v1(3310,6120) ; U9.3.3@3260,6588.82 3288.82,6588.82 v1(3310,6610) ; U9.2.3@3260,7078.82 3288.82,7078.82 v1(3310,7100) ; U9.1.3@3260,7568.82 3288.82,7568.82 v1(3310,7590) ; v1@3390,5260 v1(3389.15,5260.85) 3419.15,5260.85 3435.59,5244.41 U8.6.2@3480,5244.41 ; v1@3390,5790 v1(3389.15,5790.85) 3419.15,5790.85 3435.59,5774.41 U8.5.2@3480,5774.41 ; v1(3409.15,3790.85) v1@3410,3790 ; v1(3409.15,4770.85) v1@3410,4770 ; v1(3409.15,6770.85) v1@3410,6770 ; v1(3409.15,7750.85) v1@3410,7750 ; v1@3410,3300 v1(3409.15,3300.85) 3439.15,3300.85 3455.59,3284.41 U8.10.2@3500,3284.41 ; v1@3410,4280 v1(3409.15,4280.85) 3439.15,4280.85 3455.59,4264.41 U8.8.2@3500,4264.41 ; v1@3410,6280 v1(3409.15,6280.85) 3439.15,6280.85 3455.59,6264.41 U8.4.2@3500,6264.41 ; v1@3410,7260 v1(3409.15,7260.85) 3439.15,7260.85 3455.59,7244.41 U8.2.2@3500,7244.41 ; v1(3420,5390) C33.6.2@3484.88,5390 ; v1(3420,5920) C33.5.2@3484.88,5920 ; v1(3440,3430) C33.10.2@3504.88,3430 ; v1(3440,3920) C33.9.2@3504.88,3920 ; v1(3440,4410) C33.8.2@3504.88,4410 ; v1(3440,4900) C33.7.2@3504.88,4900 ; v1(3440,6410) C33.4.2@3504.88,6410 ; v1(3440,6900) C33.3.2@3504.88,6900 ; v1(3440,7390) C33.2.2@3504.88,7390 ; v1(3440,7880) C33.1.2@3504.88,7880 ; U8.9.2@3500,3774.41 3525.59,3774.41 3550,3750 v1(3550,3740) ; U8.7.2@3500,4754.41 3525.59,4754.41 3550,4730 v1(3550,4720) ; U8.3.2@3500,6754.41 3525.59,6754.41 3550,6730 v1(3550,6720) ; U8.1.2@3500,7734.41 3525.59,7734.41 3550,7710 v1(3550,7700) ; C34.6.1@3615.12,5070 v1(3615.12,5125.12) ; C34.5.1@3615.12,5600 v1(3615.12,5655.12) ; C34.10.1@3635.12,3110 v1(3635.12,3165.12) ; C34.9.1@3635.12,3600 v1(3635.12,3655.12) ; C34.8.1@3635.12,4090 v1(3635.12,4145.12) ; C34.7.1@3635.12,4580 v1(3635.12,4635.12) ; C34.4.1@3635.12,6090 v1(3635.12,6145.12) ; C34.3.1@3635.12,6580 v1(3635.12,6635.12) ; C34.2.1@3635.12,7070 v1(3635.12,7125.12) ; C34.1.1@3635.12,7560 v1(3635.12,7615.12) ; C38.10.1@4060,3403.46 v1(4106.54,3403.46) ; C38.9.1@4060,3893.46 v1(4106.54,3893.46) ; C38.8.1@4060,4383.46 v1(4106.54,4383.46) ; C38.7.1@4060,4873.46 v1(4106.54,4873.46) ; C38.6.1@4060,5363.46 v1(4106.54,5363.46) ; C38.5.1@4060,5893.46 v1(4106.54,5893.46) ; C38.4.1@4060,6383.46 v1(4106.54,6383.46) ; C38.3.1@4060,6873.46 v1(4106.54,6873.46) ; C38.2.1@4060,7363.46 v1(4106.54,7363.46) ; C38.1.1@4060,7853.46 v1(4106.54,7853.46) ; C37.10.1@4233.46,3110 v1(4233.46,3153.46) ; C37.9.1@4233.46,3600 v1(4233.46,3643.46) ; C37.8.1@4233.46,4090 v1(4233.46,4133.46) ; C37.7.1@4233.46,4580 v1(4233.46,4623.46) ; C37.6.1@4233.46,5070 v1(4233.46,5113.46) ; C37.5.1@4233.46,5600 v1(4233.46,5643.46) ; C37.4.1@4233.46,6090 v1(4233.46,6133.46) ; C37.3.1@4233.46,6580 v1(4233.46,6623.46) ; C37.2.1@4233.46,7070 v1(4233.46,7113.46) ; C37.1.1@4233.46,7560 v1(4233.46,7603.46) ; v1(4602.22,3097.78) 4610,3105.56 U10.10.3@4610,3167.64 ; v1(4602.22,3587.78) 4610,3595.56 U10.9.3@4610,3657.64 ; v1(4602.22,4077.78) 4610,4085.56 U10.8.3@4610,4147.64 ; v1(4602.22,4567.78) 4610,4575.56 U10.7.3@4610,4637.64 ; v1(4602.22,5057.78) 4610,5065.56 U10.6.3@4610,5127.64 ; v1(4602.22,5587.78) 4610,5595.56 U10.5.3@4610,5657.64 ; v1(4602.22,6077.78) 4610,6085.56 U10.4.3@4610,6147.64 ; v1(4602.22,6567.78) 4610,6575.56 U10.3.3@4610,6637.64 ; v1(4602.22,7057.78) 4610,7065.56 U10.2.3@4610,7127.64 ; v1(4602.22,7547.78) 4610,7555.56 U10.1.3@4610,7617.64 ; U10.10.12@4610,3372.36 v1(4610,3450) 4695,3450 4710,3435 U10.10.10@4710,3372.36 ; U10.9.12@4610,3862.36 v1(4610,3940) 4695,3940 4710,3925 U10.9.10@4710,3862.36 ; U10.8.12@4610,4352.36 v1(4610,4430) 4695,4430 4710,4415 U10.8.10@4710,4352.36 ; U10.7.12@4610,4842.36 v1(4610,4920) 4695,4920 4710,4905 U10.7.10@4710,4842.36 ; U10.6.12@4610,5332.36 v1(4610,5410) 4695,5410 4710,5395 U10.6.10@4710,5332.36 ; U10.5.12@4610,5862.36 v1(4610,5940) 4695,5940 4710,5925 U10.5.10@4710,5862.36 ; U10.4.12@4610,6352.36 v1(4610,6430) 4695,6430 4710,6415 U10.4.10@4710,6352.36 ; U10.3.12@4610,6842.36 v1(4610,6920) 4695,6920 4710,6905 U10.3.10@4710,6842.36 ; U10.2.12@4610,7332.36 v1(4610,7410) 4695,7410 4710,7395 U10.2.10@4710,7332.36 ; U10.1.12@4610,7822.36 v1(4610,7900) 4695,7900 4710,7885 U10.1.10@4710,7822.36 ; v1@4710,3450 v1(4713.46,3446.54) ; v1@4710,3940 v1(4713.46,3936.54) ; v1@4710,4430 v1(4713.46,4426.54) ; v1@4710,4920 v1(4713.46,4916.54) ; v1@4710,5410 v1(4713.46,5406.54) ; v1@4710,5940 v1(4713.46,5936.54) ; v1@4710,6430 v1(4713.46,6426.54) ; v1@4710,6920 v1(4713.46,6916.54) ; v1@4710,7410 v1(4713.46,7406.54) ; v1@4710,7900 v1(4713.46,7896.54) ; v1(5176.54,3356.54) 5240,3356.54 ; v1(5176.54,3846.54) C41.9.1@5240,3846.54 ; v1(5176.54,4336.54) C41.8.1@5240,4336.54 ; v1(5176.54,4826.54) C41.7.1@5240,4826.54 ; v1(5176.54,5316.54) 5225,5316.54 C41.6.1@5250,5341.54 ; v1(5176.54,5846.54) C41.5.1@5240,5846.54 ; v1(5176.54,6826.54) C41.3.1@5240,6826.54 ; v1(5176.54,7316.54) C41.2.1@5240,7316.54 ; v1(5176.54,7806.54) 5240,7806.54 ; v1(5225,6300) 5225,6341.54 C41.4.1@5245,6361.54 ; v1(5260,3090) C42.10.1@5260,3136.54 ; v1(5260,3580) C42.9.1@5260,3626.54 ; v1(5260,4070) C42.8.1@5260,4116.54 ; v1(5260,4560) C42.7.1@5260,4606.54 ; v1(5260,5050) C42.6.1@5260,5096.54 ; v1(5260,5580) C42.5.1@5260,5626.54 ; v1(5260,6070) C42.4.1@5260,6116.54 ; v1(5260,6560) C42.3.1@5260,6606.54 ; v1(5260,7050) C42.2.1@5260,7096.54 ; v1(5260,7540) C42.1.1@5260,7586.54 ; 5347.4,5352.6 U1.6.2@5407.68,5352.6 ; v1(5396.54,3153.46) C4.10.1@5396.54,3190 ; v1(5396.54,3643.46) C4.9.1@5396.54,3680 ; v1(5396.54,4133.46) C4.8.1@5396.54,4170 ; v1(5396.54,4623.46) C4.7.1@5396.54,4660 ; v1(5396.54,5113.46) C4.6.1@5396.54,5150 ; v1(5396.54,5643.46) C4.5.1@5396.54,5680 ; v1(5396.54,6133.46) C4.4.1@5396.54,6170 ; v1(5396.54,6623.46) C4.3.1@5396.54,6660 ; v1(5396.54,7113.46) C4.2.1@5396.54,7150 ; v1(5396.54,7603.46) C4.1.1@5396.54,7640 ; v1(5510,3170) 5510,3200 5520.31,3210.32 U2.10.4@5559.29,3210.32 ; 5510,3190 5510.63,3190.63 U2.10.5@5559.29,3190.63 ; v1(5510,3660) 5510,3690 5520.31,3700.32 U2.9.4@5559.29,3700.32 ; 5510,3680 5510.63,3680.63 U2.9.5@5559.29,3680.63 ; v1(5510,4150) 5510,4180 5520.31,4190.31 U2.8.4@5559.29,4190.31 ; 5510,4170 5510.63,4170.63 U2.8.5@5559.29,4170.63 ; v1(5510,4640) 5510,4670 5520.31,4680.31 U2.7.4@5559.29,4680.31 ; 5510,4660 5510.63,4660.63 U2.7.5@5559.29,4660.63 ; v1(5510,5130) 5510,5160 5520.31,5170.31 U2.6.4@5559.29,5170.31 ; 5510,5150 5510.63,5150.63 U2.6.5@5559.29,5150.63 ; v1(5510,5660) 5510,5690 5520.31,5700.31 U2.5.4@5559.29,5700.31 ; 5510,5680 5510.63,5680.63 U2.5.5@5559.29,5680.63 ; v1(5510,6150) 5510,6180 5520.31,6190.31 U2.4.4@5559.29,6190.31 ; 5510,6170 5510.63,6170.63 U2.4.5@5559.29,6170.63 ; v1(5510,6640) 5510,6670 5520.31,6680.31 U2.3.4@5559.29,6680.31 ; 5510,6660 5510.63,6660.63 U2.3.5@5559.29,6660.63 ; v1(5510,7130) 5510,7160 5520.31,7170.31 U2.2.4@5559.29,7170.31 ; 5510,7150 5510.63,7150.63 U2.2.5@5559.29,7150.63 ; v1(5510,7620) 5510,7650 5520.31,7660.31 U2.1.4@5559.29,7660.31 ; 5510,7640 5510.63,7640.63 U2.1.5@5559.29,7640.63 ; v1(5540,3460) C2.10.1@5590,3460 ; v1(5540,3950) C2.9.1@5590,3950 ; v1(5540,4440) C2.8.1@5590,4440 ; v1(5542.6,4927.4) C2.7.1@5590,4927.4 ; v1(5542.6,5947.4) C2.5.1@5590,5947.4 ; v1(5542.6,6437.4) C2.4.1@5590,6437.4 ; v1(5542.6,7417.4) C2.2.1@5590,7417.4 ; v1(5547.4,5417.4) C2.6.1@5590,5417.4 ; v1(5547.4,6927.4) C2.3.1@5590,6927.4 ; v1(5547.4,7907.4) C2.1.1@5590,7907.4 ; v1(5743.46,5423.46) R45.1@5780,5423.46 ; v1(5763.46,7863.46) R46.1@5840,7863.46 ; R38.1@6220,4773.46 v1(6220,4810) ; v1(6345,3705) U14.9@6424.69,3705 ; v1(6355,3405) U14.15@6424.69,3405 ; v1(6365,4715) U15.2@6424.69,4715 ; v1(6424.69,4385.31) U15.8@6424.69,4415 ; v1(6510,7750) 6536.54,7776.54 R29.1@6536.54,7800 ; v1(6560,6800) C64.2@6560,6860.94 ; v1(6790,6790) 6782.8,6797.2 6782.8,6922.8 v1(6800,6940)
  Top Layer w16: v1(5360,3390) U1.10.2@5407.68,3390 ; v1(5360,3880) U1.9.2@5407.68,3880 ; v1(5360,4370) U1.8.2@5407.68,4370 ; v1(5360,4860) U1.7.2@5407.68,4860 ; v1(5360,5350) U1.6.2@5407.68,5350 ; v1(5360,5880) U1.5.2@5407.68,5880 ; v1(5360,6370) U1.4.2@5407.68,6370 ; v1(5360,6860) U1.3.2@5407.68,6860 ; v1(5360,7350) U1.2.2@5407.68,7350 ; v1(5360,7840) U1.1.2@5407.68,7840 ; v1(6640,7650) 6650,7640 ; v1(6696.54,7203.46) v1(6696.54,7296.54) ; v1(6750,7900) 6770,7880 C54.2@6770,7829.06 ; v1(6800,6940) 6808.39,6931.61 U25.4@6808.39,6868.31 ; v1(6860.94,7449.06) v1(6999.06,7449.06) ; U24.3@6972.8,7578.31 6972.8,7527.2 v1(6990,7510) ; U24.4@6998.39,7578.31 7030,7609.92 v1(7030,7610)
  Top Layer w25: C69.2@7340,7308.11 C70.1@7340,7511.89
  Bottom Layer w8: v1(3939.57,3320.43) v1@3940,3320 ; v1(5510,3170) 5530,3190 C5.10.1@5560,3190 ; v1(5510,3660) 5530,3680 C5.9.1@5560,3680 ; v1(5510,4150) 5530,4170 C5.8.1@5560,4170 ; v1(5510,4640) 5530,4660 C5.7.1@5560,4660 ; v1(5510,5130) 5530,5150 C5.6.1@5560,5150 ; v1(5510,5660) 5530,5680 C5.5.1@5560,5680 ; v1(5510,6150) 5530,6170 C5.4.1@5560,6170 ; v1(5510,6640) 5530,6660 C5.3.1@5560,6660 ; v1(5510,7130) 5530,7150 C5.2.1@5560,7150 ; v1(5510,7620) 5530,7640 C5.1.1@5560,7640 ; v1@6340,3700 v1(6345,3705) ; v1(6355,3405) 6356.54,3403.46 C51.1@6420,3403.46 ; v1(6365,4715) 6360,4710 6407.78,4710 C49.1@6420,4722.22 ; v1(6424.69,4385.31) v1@6430,4380
  Bottom Layer w12: C44.8.2@2680,3219.15 v1(2680,3270) ; C43.8.2@2680,3419.15 v1(2719.15,3419.15) ; C44.7.2@2680,3709.15 v1(2680,3760) ; C43.7.2@2680,3909.15 v1(2719.15,3909.15) ; C44.6.2@2680,4199.15 v1(2680,4250) ; C43.6.2@2680,4399.15 v1(2719.15,4399.15) ; C44.5.2@2680,4689.15 v1(2680,4740) ; C43.5.2@2680,4889.15 v1(2719.15,4889.15) ; C44.4.2@2680,6199.15 v1(2680,6250) ; C43.4.2@2680,6399.15 v1(2719.15,6399.15) ; C44.3.2@2680,6689.15 v1(2680,6740) ; C43.3.2@2680,6889.15 v1(2719.15,6889.15) ; C44.2.2@2680,7179.15 v1(2680,7230) ; C43.2.2@2680,7379.15 v1(2719.15,7379.15) ; C44.1.2@2680,7669.15 v1(2680,7720) ; C43.1.2@2680,7869.15 v1(2719.15,7869.15) ; C31.6.2@3180,5359.15 3180,5370 v1(3210,5400) ; C31.5.2@3180,5889.15 3180,5900 v1(3210,5930) ; C31.10.2@3200,3399.15 3200,3410 v1(3230,3440) ; C31.9.2@3200,3889.15 3200,3900 v1(3230,3930) ; C31.8.2@3200,4379.15 3200,4390 v1(3230,4420) ; C31.7.2@3200,4869.15 3200,4880 v1(3230,4910) ; C31.4.2@3200,6379.15 3200,6390 v1(3230,6420) ; C31.3.2@3200,6869.15 3200,6880 v1(3230,6910) ; C31.2.2@3200,7359.15 3200,7370 v1(3230,7400) ; C31.1.2@3200,7849.15 3200,7860 v1(3230,7890) ; C29.6.2@3340,5260.85 v1(3389.15,5260.85) 3402.22,5247.78 C32.6.1@3480,5247.78 ; C29.5.2@3340,5790.85 v1(3389.15,5790.85) 3402.22,5777.78 C32.5.1@3480,5777.78 ; C29.10.2@3360,3300.85 v1(3409.15,3300.85) 3422.22,3287.78 C32.10.1@3500,3287.78 ; C29.9.2@3360,3790.85 v1(3409.15,3790.85) 3422.22,3777.78 C32.9.1@3500,3777.78 ; C29.8.2@3360,4280.85 v1(3409.15,4280.85) 3422.22,4267.78 C32.8.1@3500,4267.78 ; C29.7.2@3360,4770.85 v1(3409.15,4770.85) 3422.22,4757.78 C32.7.1@3500,4757.78 ; C29.4.2@3360,6280.85 v1(3409.15,6280.85) 3422.22,6267.78 C32.4.1@3500,6267.78 ; C29.3.2@3360,6770.85 v1(3409.15,6770.85) 3422.22,6757.78 C32.3.1@3500,6757.78 ; C29.2.2@3360,7260.85 v1(3409.15,7260.85) 3422.22,7247.78 C32.2.1@3500,7247.78 ; C29.1.2@3360,7750.85 v1(3409.15,7750.85) 3422.22,7737.78 C32.1.1@3500,7737.78 ; v1(3550,3740) 3579.15,3710.85 C28.9.2@3600,3710.85 ; v1(3550,4720) 3579.15,4690.85 C28.7.2@3600,4690.85 ; v1(3550,6720) 3579.15,6690.85 C28.3.2@3600,6690.85 ; v1(3550,7700) 3579.15,7670.85 C28.1.2@3600,7670.85 ; 3559.15,5180.85 C28.6.2@3580,5180.85 ; 3559.15,5710.85 C28.5.2@3580,5710.85 3615.12,5675.73 v1(3615.12,5655.12) v1@3620,5660 ; 3579.15,3220.85 C28.10.2@3600,3220.85 3600,3200.24 v1(3635.12,3165.12) v1@3640,3170 ; 3579.15,4200.85 C28.8.2@3600,4200.85 3600,4180.24 v1(3635.12,4145.12) v1@3640,4150 ; 3579.15,6200.85 C28.4.2@3600,6200.85 3600,6180.24 v1(3635.12,6145.12) v1@3640,6150 ; 3579.15,7180.85 C28.2.2@3600,7180.85 ; 3580,5213.13 C28.6.2@3580,5160.24 ; C28.2.2@3590,7180.85 3590,7170.24 v1(3635.12,7125.12) v1@3640,7130 ; v1@3620,5130 v1(3615.12,5125.12) ; v1(3635.12,3655.12) v1@3640,3660 ; v1(3635.12,4635.12) v1@3640,4640 ; v1(3635.12,6635.12) v1@3640,6640 ; v1(3635.12,7615.12) v1@3640,7620 ; v1(4106.54,3403.46) v1@4110,3400 ; v1(4106.54,3893.46) v1@4110,3890 ; v1(4106.54,4383.46) v1@4110,4380 ; v1(4106.54,4873.46) v1@4110,4870 ; v1(4106.54,5363.46) v1@4110,5360 ; v1(4106.54,5893.46) v1@4110,5890 ; v1(4106.54,6383.46) v1@4110,6380 ; v1(4106.54,6873.46) v1@4110,6870 ; v1(4106.54,7363.46) v1@4110,7360 ; v1(4106.54,7853.46) v1@4110,7850 ; v1(4602.22,3097.78) C71.10.1@4602.22,3170 ; v1(4602.22,3587.78) C71.9.1@4602.22,3660 ; v1(4602.22,4077.78) C71.8.1@4602.22,4150 ; v1(4602.22,4567.78) C71.7.1@4602.22,4640 ; v1(4602.22,5057.78) C71.6.1@4602.22,5130 ; v1(4602.22,5587.78) C71.5.1@4602.22,5660 ; v1(4602.22,6077.78) C71.4.1@4602.22,6150 ; v1(4602.22,6567.78) C71.3.1@4602.22,6640 ; v1(4602.22,7057.78) C71.2.1@4602.22,7130 ; v1(4602.22,7547.78) C71.1.1@4602.22,7620 ; C72.10.2@4713.46,3370 v1(4713.46,3446.54) ; C72.9.2@4713.46,3860 v1(4713.46,3936.54) ; C72.8.2@4713.46,4350 v1(4713.46,4426.54) ; C72.7.2@4713.46,4840 v1(4713.46,4916.54) ; C72.6.2@4713.46,5330 v1(4713.46,5406.54) ; C72.5.2@4713.46,5860 v1(4713.46,5936.54) ; C72.4.2@4713.46,6350 v1(4713.46,6426.54) ; C72.3.2@4713.46,6840 v1(4713.46,6916.54) ; C72.2.2@4713.46,7330 v1(4713.46,7406.54) ; C72.1.2@4713.46,7820 v1(4713.46,7896.54) ; v1(5720,3160) C3.10.1@5720,3198.28 ; v1(5720,3650) C3.9.1@5720,3688.28 ; v1(5720,4140) C3.8.1@5720,4178.28 ; v1(5720,4630) C3.7.1@5720,4668.28 ; v1(5720,5120) C3.6.1@5720,5158.28 ; v1(5720,5650) C3.5.1@5720,5688.28 ; v1(5720,6140) C3.4.1@5720,6178.28 ; v1(5720,6630) C3.3.1@5720,6668.28 ; v1(5720,7120) C3.2.1@5720,7158.28 ; v1(5720,7610) C3.1.1@5720,7648.28 ; C28.6.2@3580,5160.24 v1(3615.12,5125.12) ; C28.6.2@3580,5160.24 v1(3615.12,5125.12)
  Bottom Layer w16: v1(5360,3390) C1.10.2@5406.54,3390 ; v1(5360,3880) C1.9.2@5406.54,3880 ; v1(5360,4370) C1.8.2@5406.54,4370 ; v1(5360,4860) C1.7.2@5406.54,4860 ; v1(5360,5350) C1.6.2@5406.54,5350 ; v1(5360,5880) C1.5.2@5406.54,5880 ; v1(5360,6370) C1.4.2@5406.54,6370 ; v1(5360,6860) C1.3.2@5406.54,6860 ; v1(5360,7350) C1.2.2@5406.54,7350 ; v1(5360,7840) C1.1.2@5406.54,7840 ; v1(6480,7480) C59.1@6526.54,7480 ; C58.1@6593.46,7650 v1(6640,7650) ; v1(6790,6790) 6790,6826.54 C65.2@6793.46,6830 ; C76.2@6795.21,6900 6800,6904.79 v1(6800,6940) ; C66.2@6860,7030 v1(6910,7030) ; C55.2@7003.46,7560 7003.46,7583.46 v1(7030,7610) ; C57.2@7005.21,7660 v1(7050,7660) ; C56.2@7053.46,7740 v1(7100,7740)
  other v2: 7340,7410